# Altium PCB UNOCompatibleBoard-MBH.PcbDoc
Units mm, origin at the board's own origin, x right, y up, seen from the top; angles counter-clockwise.
Board outline 68.58 x 53.34 mm, 2 copper layers (Top Layer, Bottom Layer); 6 components, 26 nets, 70 pads, 4 vias.
Unrouted connection lines stored in the file: 10.
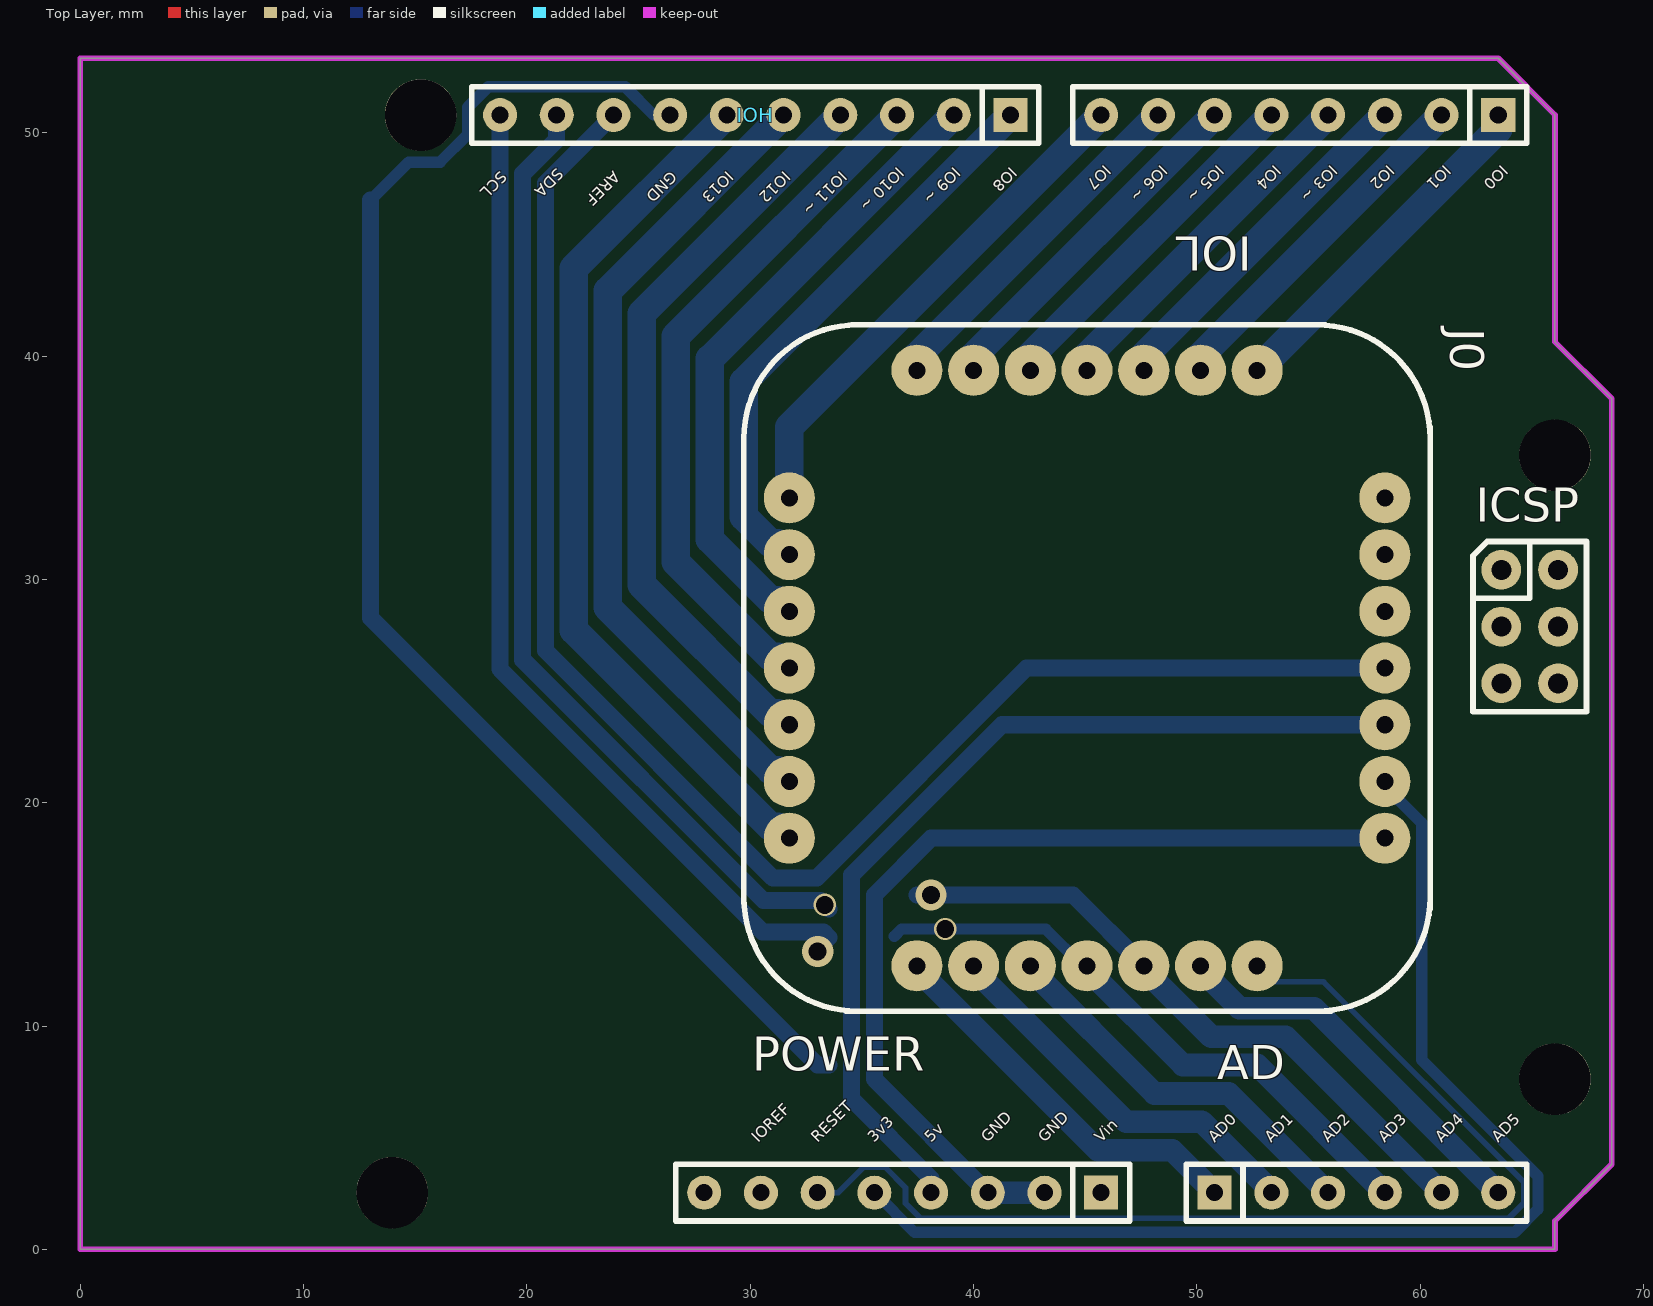
[diagram p0: Top Layer view]
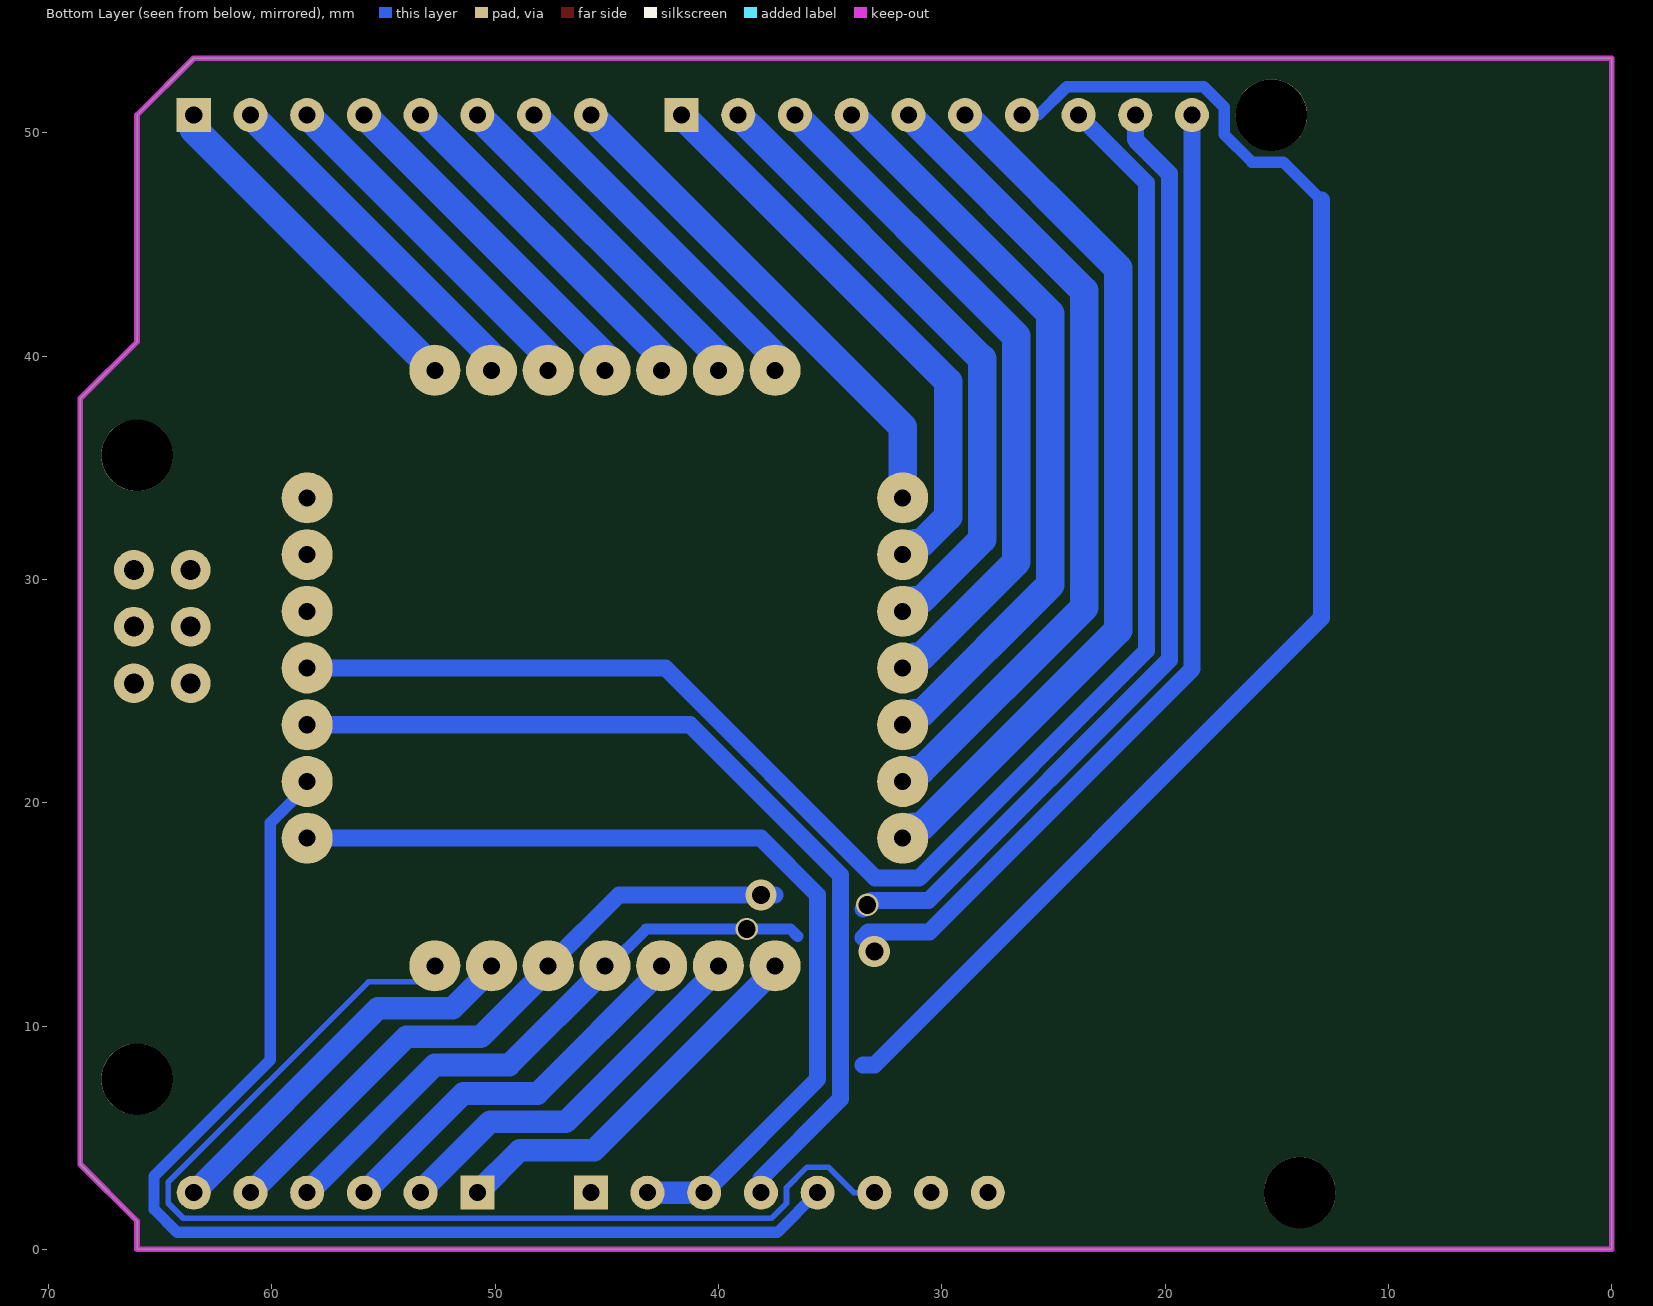
[diagram p1: Bottom Layer view, seen from below]
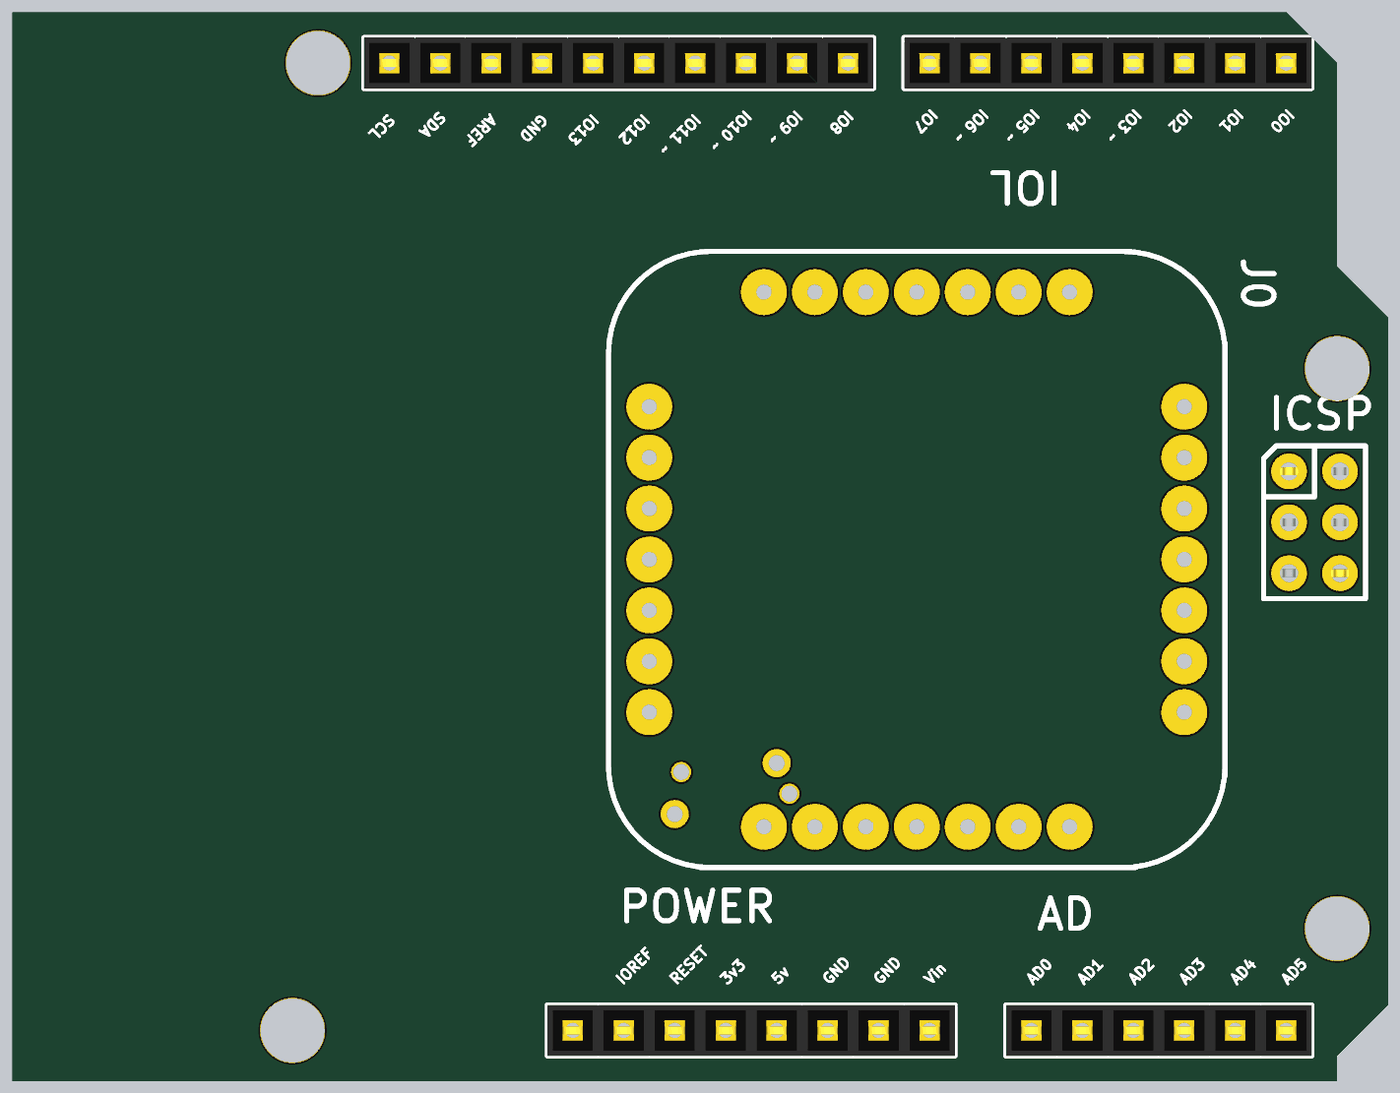
[diagram p2: 3D render of the assembled board from above, using the file's embedded part models]

## Layer stack, top to bottom
Top Solder: solder mask 0.0102, Solder Resist, Dk 3.5
Top Layer: signal copper 0.0356
Dielectric1: dielectric 0.32, FR-4, Dk 4.8
Bottom Layer: signal copper 0.0356
Bottom Solder: solder mask 0.0102, Solder Resist, Dk 3.5

## Board outline
0,0 0,53.34 63.5,53.34 66.04,50.8 66.04,40.64 68.58,38.1 68.58,3.81 66.04,1.27 66.04,0

## Design rules (kind name [scope] priority, off if disabled: settings)
Clearance [All] p1: gap=0.254
PolygonConnect [All] p1: connectstyle=Relief reliefconductorwidth=0.254 reliefentries=4 polygonreliefangle="90 Angle" airgapwidth=0.254
RoutingVias [All] p1: holewidth=0.711 width=1.27 viastyle="Through Hole" minholewidth=0.711 minwidth=1.27 maxholewidth=0.711 maxwidth=1.27
SilkToSolderMaskClearance SilkscreenOverComponentPads [IsPad] p1: minsilkscreentomaskgap=0.254 clearancetoexposedcopper=TRUE
SolderMaskExpansion [All] p1: expansion=0.102
Width [All] p1: maxlimit=2.54 minlimit=0.254 preferedwidth=1.27
28 further rules are at their usual default settings.

## Components (designator, comment, footprint, x,y, rotation, side; value= is the part's Value field where it differs from the comment)
AD "AD" "Header 6x1 8.5mm" 50.8,2.54 r0 top locked
ICSP "ICSP" ICSP 63.64,30.43 r0 top locked
IOH "IOH" "Header 10x1 8.5mm" 41.656,50.8 r180 top locked
IOL "IOL" "Header 8x1 8.5mm" 63.5,50.8 r180 top locked
J0 "MAGI-M8" MAGI-M8 45.085,26.035 r270 top
POWER "POWER_UNO" "Header 8x1 8.5mm" 45.72,2.54 r180 top locked

## Footprints (in the part's own frame and the unit in brackets; to place one, negate y for a bottom-side part, rotate by r counter-clockwise, add the part's x,y. Pads: shape width x height; smd on the part's side, far side on the other; paste and mask are expansions set on the pad)
"Header 6x1 8.5mm" [mil] "Stackable 6 pin header"
  rect 60x60 hole 30: 1(0,0)
  round 60 hole 30: 2(100,0) 3(200,0) 4(300,0) 5(400,0) 6(500,0)
  silkscreen extent -50,-50 550,50, body extent -50,-50 550,50, height 335
"Header 8x1 8.5mm" [mil] "Stackable 8 pin header"
  rect 60x60 hole 30: 1(0,0)
  round 60 hole 30: 2(100,0) 3(200,0) 4(300,0) 5(400,0) 6(500,0) 7(600,0) 8(700,0)
  silkscreen extent -50,-50 750,50, body extent -50,-50 750,50, height 335
"Header 10x1 8.5mm" [mil] "Stackable 10 pin header"
  rect 60x60 hole 30: 1(0,0)
  round 60 hole 30: 2(100,0) 3(200,0) 4(300,0) 5(400,0) 6(500,0) 7(600,0) 8(700,0) 9(800,0) 10(900,0)
  silkscreen extent -50,-50 950,50, body extent -50,-50 950,50, height 335
ICSP [mil]
  round 70 hole 35.43: 1(0,0) 2(100,0) 3(0,-100) 4(100,-100) 5(0,-200) 6(100,-200)
  silkscreen extent -50,-250 150,50, body extent -50,-250 150,50, height 485
MAGI-M8 [mil]
  round 90 hole 30: 1(300,525) 2(200,525) 3(100,525) 4(0,525) 5(-100,525) 6(-200,525) 7(-300,525) 8(-525,300) 9(-525,200) 10(-525,100) 11(-525,0) 12(-525,-100) 13(-525,-200) 14(-525,-300) 15(-300,-525) 16(-200,-525) 17(-100,-525) 18(0,-525) 19(100,-525) 20(200,-525) 21(300,-525) 22(525,-300) 23(525,-200) 24(525,-100) 25(525,0) 26(525,100) 27(525,200) 28(525,300)
  silkscreen extent -605,-605 605,605

## Free pads (board coordinates)
  round 3.2 hole 3.2: 0(13.97,2.54) 0(15.24,50.8) 0(66.04,7.62) 0(66.04,35.56)

## Via types
v1: diameter 1, hole 0.8, Top Layer to Bottom Layer, 2 vias
v2: diameter 1.4, hole 0.8, Top Layer to Bottom Layer, 2 vias

## Nets (pads, with @x,y where several pads share a name; then routed paths per layer and width w, separated by ;. In a path a pad name is that pad's centre, name@x,y a point inside that pad or via, vN(x,y) a via of type N, cw(c..) or ccw(c..) an arc to the next point about the centre after c; other vN are vias at no path point)
3V3: J0.2 POWER.5 POWER.7 | length 52.9
  Bottom Layer w0.508: POWER.5 35.586,2.54 37.364,0.762 64.236,0.762 65.278,1.804 65.278,3.276 60.071,8.483 60.071,19.099 58.42,20.75 J0.2
5V: ICSP.2 J0.3 POWER.4 | length 42.4
  Bottom Layer w0.762: POWER.4 38.1,3.175 34.544,6.731 34.544,16.764 41.275,23.495 J0.3
AD0: AD.1 J0.22 | length 17.6
  Bottom Layer w1.016: J0.22 37.465,12.546 45.566,4.445 48.895,4.445 AD.1
AD1: AD.2 J0.23 | length 17.7
  Bottom Layer w1.016: J0.23 40.005,12.546 46.836,5.715 50.227,5.715 53.34,2.602 AD.2
AD2: AD.3 J0.24 | length 17.6
  Bottom Layer w1.016: J0.24 42.545,12.546 48.106,6.985 51.435,6.985 AD.3
AD3: AD.4 J0.25 | length 27.1
  Bottom Layer w0.508: 36.449,14.019 36.781,14.351 43.229,14.351 44.88,12.7 J0.25
  Bottom Layer w1.016: J0.25 45.085,12.546 49.376,8.255 52.705,8.255 AD.4
  other v1: 38.735,14.351
AD4: AD.5 IOH.9 J0.26 | length 72.6
  Bottom Layer w0.508: v1@33.591,15.303 v1@33.655,15.24
  Bottom Layer w0.762: IOH.9 21.336,49.697 19.812,48.173 19.812,26.402 30.593,15.621 33.147,15.621 v1@33.528,15.24 ; v2@37.465,15.875 44.45,15.875 J0.26
  Bottom Layer w1.016: J0.26 47.625,12.546 50.646,9.525 53.975,9.525 AD.5
  other v1: 33.337,15.43
  other v2: 38.1,15.875
AD5: AD.6 IOH.10 J0.27 | length 62.2
  Bottom Layer w0.762: IOH.10 18.796,25.981 30.553,14.224 33.274,14.224 33.528,13.97
  Bottom Layer w1.016: J0.27 50.165,12.546 51.916,10.795 55.245,10.795 AD.6
  other v2: 33.02,13.335
AREF: IOH.8 J0.4 | length 70.9
  Bottom Layer w0.762: IOH.8 20.828,47.752 20.828,26.823 31.014,16.637 32.98,16.637 42.378,26.035 J0.4
GND: ICSP.6 IOH.7 J0.1 POWER.2 POWER.3 | length 106.2
  Bottom Layer w0.508: 13.005,46.99 14.707,48.692 16.113,48.692 17.348,49.927 17.348,51.148 18.27,52.07 24.402,52.07 25.672,50.8 IOH.7
  Bottom Layer w0.762: 13.005,46.99 13.005,28.27 33.02,8.255 33.528,8.255 ; POWER.3 35.56,7.62 35.56,15.875 38.1,18.415 J0.1
  Bottom Layer w1.016: POWER.3 POWER.2
IO0: IOL.1 J0.8 | length 15.9
  Bottom Layer w1.27: J0.8 63.5,50.165 IOL.1
IO1: IOL.2 J0.9 | length 15.9
  Bottom Layer w1.27: J0.9 50.165,40.005 IOL.2
IO2: IOL.3 J0.10 | length 15.9
  Bottom Layer w1.27: J0.10 47.625,40.005 IOL.3
IO3: IOL.4 J0.11 | length 15.9
  Bottom Layer w1.27: J0.11 45.085,40.005 IOL.4
IO4: IOL.5 J0.12 | length 15.9
  Bottom Layer w1.27: J0.12 42.545,40.005 IOL.5
IO5: IOL.6 J0.13 | length 15.9
  Bottom Layer w1.27: J0.13 40.005,40.005 IOL.6
IO6: IOL.7 J0.14 | length 15.9
  Bottom Layer w1.27: J0.14 37.465,40.005 IOL.7
IO7: IOL.8 J0.15 | length 22.9
  Bottom Layer w1.27: J0.15 31.75,36.83 IOL.8
IO8: IOH.1 J0.16 | length 25.7
  Bottom Layer w1.27: J0.16 31.242,31.623 30.908,31.623 29.718,32.813 29.718,38.862 IOH.1
IO9: IOH.2 J0.17 | length 28.4
  Bottom Layer w1.27: J0.17 31.242,29.083 30.908,29.083 28.194,31.797 28.194,39.878 IOH.2
IO10: IOH.3 J0.18 | length 31.2
  Bottom Layer w1.27: J0.18 31.242,26.543 30.908,26.543 26.67,30.781 26.67,40.894 IOH.3
IO11: ICSP.4 IOH.4 J0.19 | length 33.9
  Bottom Layer w1.27: J0.19 31.242,24.003 30.908,24.003 25.146,29.765 25.146,41.91 IOH.4
IO12: ICSP.1 IOH.5 J0.20 | length 36.7
  Bottom Layer w1.27: IOH.5 23.622,42.926 23.622,28.749 30.908,21.463 31.242,21.463 J0.20
IO13: ICSP.3 IOH.6 J0.21 | length 39.4
  Bottom Layer w1.27: IOH.6 22.098,43.942 22.098,27.733 30.908,18.923 31.242,18.923 J0.21
RESET: ICSP.5 J0.28 POWER.6 | length 50.6
  Bottom Layer w0.254: POWER.6 33.944,2.54 35.087,3.683 36.033,3.683 36.957,2.759 36.957,2.067 37.627,1.397 63.973,1.397 64.643,2.067 64.643,3.013 55.675,11.982 53.423,11.982 J0.28
VIN: POWER.1
pads on no net: J0.5 J0.6 J0.7 POWER.8

## Keep-outs
Keep-Out Layer:
  the board outline again, w0.254

## Silkscreen, mask and mechanical layers (free items; w line width, h text height)
Top Overlay:
  text "IO7" at 45.847,48.588 h0.51 r225
  text "IO6 ~" at 48.387,48.588 h0.51 r225
  text "IO5 ~" at 50.927,48.588 h0.51 r225
  text "IO4" at 53.467,48.588 h0.51 r225
  text "IO3 ~" at 56.007,48.588 h0.51 r225
  text "IO2" at 58.547,48.588 h0.51 r225
  text "IO1" at 61.087,48.588 h0.51 r225
  text "IO0" at 63.627,48.588 h0.51 r225
  text "IO10 ~" at 36.576,48.514 h0.51 r225
  text "IO9 ~" at 39.116,48.514 h0.51 r225
  text "IO8" at 41.656,48.514 h0.51 r225
  text "SDA" at 21.336,48.461 h0.51 r225
  text "SCL" at 18.796,48.334 h0.51 r225
  text "AREF" at 23.876,48.334 h0.51 r225
  text "GND" at 26.416,48.334 h0.51 r225
  text "IO13" at 28.956,48.334 h0.51 r225
  text "IO12" at 31.496,48.334 h0.51 r225
  text "IO11 ~" at 34.036,48.334 h0.51 r225
  text "IOREF" at 30.353,4.752 h0.51 r45
  text "RESET" at 33.02,4.752 h0.51 r45
  text "3v3" at 35.56,4.752 h0.51 r45
  text "5v" at 38.1,4.752 h0.51 r45
  text "GND" at 40.64,4.752 h0.51 r45
  text "GND" at 43.18,4.752 h0.51 r45
  text "Vin" at 45.72,4.752 h0.51 r45
  text "AD0" at 50.8,4.752 h0.51 r45
  text "AD1" at 53.34,4.752 h0.51 r45
  text "AD2" at 55.88,4.752 h0.51 r45
  text "AD3" at 58.42,4.752 h0.51 r45
  text "AD4" at 60.96,4.752 h0.51 r45
  text "AD5" at 63.5,4.752 h0.51 r45
  text "RESET" at 32.893,-63.881 h0.51 r45
  text "3v3" at 35.433,-63.881 h0.51 r45
  text "5v" at 37.973,-63.881 h0.51 r45
  text "GND" at 40.513,-63.881 h0.51 r45
  text "GND" at 43.053,-63.881 h0.51 r45
  text "Vin" at 45.593,-63.881 h0.51 r45
Mechanical 1:
  circle w0.127: c66.04,35.56 r1.6
  circle w0.127: c13.97,2.54 r1.6
  circle w0.127: c66.04,7.62 r1.6
  circle w0.127: c15.24,50.8 r1.6